# Altium PCB pcb.pcbdoc
Units mil, origin at the board's own origin, x right, y up, seen from the top; angles counter-clockwise.
Board outline 600 x 600 mil, 2 copper layers (Top Layer, Bottom Layer), stack 62.8 mil thick; 14 components, 23 nets, 74 pads, 6 vias.
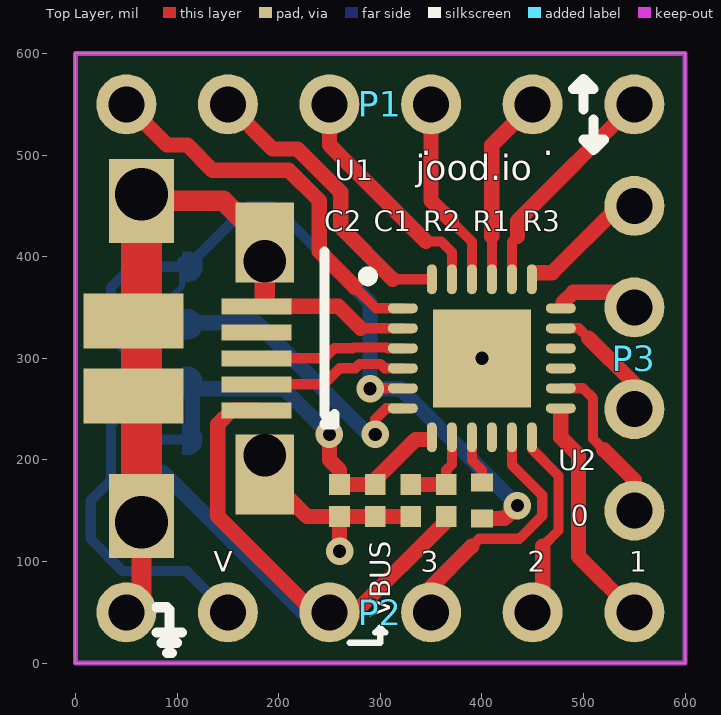
[diagram p0: Top Layer view]
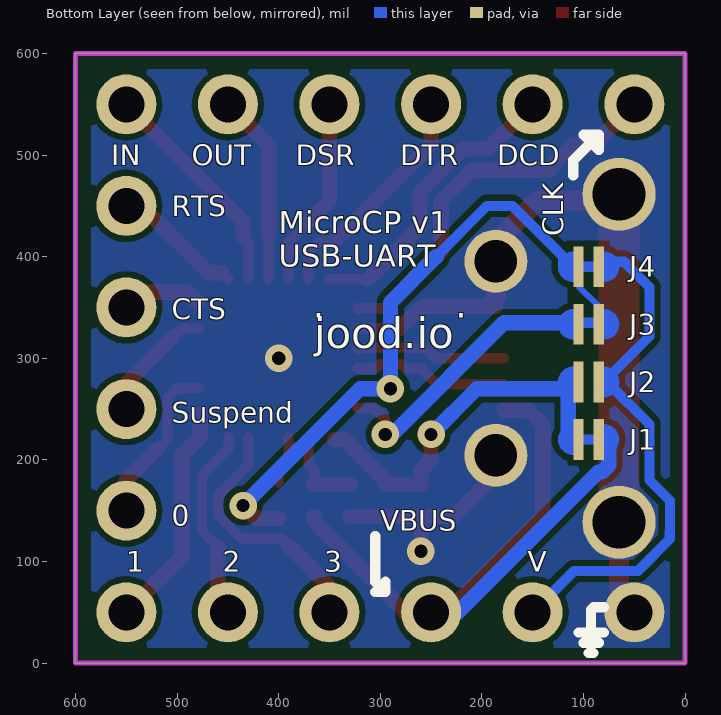
[diagram p1: Bottom Layer view, seen from below]

## Layer stack, top to bottom
Top Solder: solder mask 1, Solder Resist, Dk 3.5
Top Layer: signal copper 1.4
Core: dielectric 60, FR-4, Dk 4.6
Bottom Layer: signal copper 1.4
Bottom Solder: solder mask 1, Solder Resist, Dk 3.5

## Board outline
0,0 600,0 600,600 0,600

## Design rules (kind name [scope] priority, off if disabled: settings)
BoardOutlineClearance [All] p1: gap=15
Clearance [All] p1: gap=6
ComponentClearance [All] p1 off: gap=6 collisioncheckmode=3 verticalgap=100000 showdistances=FALSE
DiffPairsRouting [All] p1: maxlimit=10 minlimit=6 mostfreqgap=6 toplayer_minwidth=6 toplayer_maxwidth=10 toplayer_prefwidth=6 bottomlayer_minwidth=6 bottomlayer_maxwidth=10 bottomlayer_prefwidth=6 maxuncoupledlength=500
Height [All] p1 off: minheight=0 maxheight=1000 prefheight=500
HoleSize [All] p1: absolutevalues=TRUE maxlimit=100 minlimit=13 maxpercent=80.000 minpercent=20.000
MinimumAnnularRing [All] p1: minimumring=7
MinimumSolderMaskSliver [All] p1: minsoldermaskwidth=4
PlaneClearance [All] p1: clearance=15
PlaneConnect [All] p1: planeconnectstyle=Direct reliefexpansion=20 reliefentries=4 reliefconductorwidth=10 reliefairgap=10
PolygonConnect [All] p1: connectstyle=Direct reliefconductorwidth=10 reliefentries=4 polygonreliefangle="90 Angle" airgapwidth=10
RoutingVias [All] p1: holewidth=13 width=27 viastyle="Through Hole" minholewidth=13 minwidth=27 maxholewidth=13 maxwidth=27
SilkToBoardRegionClearance [All] p1 off:
SilkToSilkClearance [All] p1 off: silktosilkclearance=6
SilkToSolderMaskClearance [IsPad] p1 off: minsilkscreentomaskgap=6 clearancetoexposedcopper=TRUE
SolderMaskExpansion [All] p1: expansion=3
Width [All] p1: maxlimit=50 minlimit=6 preferedwidth=6
Width Width_50_impdedance [All] p2: maxlimit=10 minlimit=10 preferedwidth=10 impedancedriven=TRUE minimp=50.000000 maximp=50.000000 favimp=50.000000
20 further rules are at their usual default settings.

## Classes and differential pairs
differential pair D: +D_P -D_N

## Components (designator, comment, footprint, x,y, rotation, side; value= is the part's Value field where it differs from the comment)
C1 "0.10µF" 0402L 295,160 r90 top
C2 "4.7uF" 0402L 260,160 r90 top
J1 "Jumper_Open" JO 95,220 r180 bottom
J2 "Jumper_Open" JO 95,276.67 r0 bottom
J3 "Jumper_Open" JO 95,333.33 r0 bottom
J4 "Jumper_Open" JO 95,390 r0 bottom
P1 "Header 6" HDR1X6 550,550 r180 top locked
P2 "Header 6" HDR1X6 550,50 r180 top locked
P3 "Header 4" HDR1X4 550,150 r90 top locked
R1 "22.1K" 0402L 365,160 r270 top
R2 "47.5K" 0402L 330,160 r90 top
R3 "1K" RESC0402(1005)_L 400,160 r270 top
U1 "10103592-0001LF" 10103592-0001LF_NOSLOTS 178.15,300 r270 top
U2 "CP2102N-A01-GQFN24" CP2102N-QFN24 400,300 r0 top

## Footprints (in the part's own frame and the unit in brackets; to place one, negate y for a bottom-side part, rotate by r counter-clockwise, add the part's x,y. Pads: shape width x height; smd on the part's side, far side on the other; paste and mask are expansions set on the pad)
0402L [mm] "0402L"
  rect 0.52x0.52 smd: 1(-0.4,0) 2(0.4,0)
  body extent -0.55,-0.3 0.55,0.3, height 0.6
10103592-0001LF_NOSLOTS [mm] "micro B USB 2.0 Receptacle Connector 5 Position Surface Mount, Right Angle, Horizontal Rev"
  rect 2.1x1.625 smd: 0(-3.938,-2.875) 0(3.938,-2.875)
  rect 2x1.46 smd: 0(-2.9,0.205) 0(2.9,0.205)
  rect 1.375x2.5 smd: 0(-0.937,-3.075) 0(0.937,-3.075)
  rect 0.4x1.75 smd mask+0.071: 1(1.3,0) 2(0.65,0) 3(0,0) 4(-0.65,0) 5(-1.3,0)
CP2102N-QFN24 [mm] "QFN, 24-Leads, Body 4.00x4.00mm, Pitch 0.50mm, Thermal Pad 2.45x2.45mm, IPC Medium Density"
  rect 2.45x2.45 smd mask+0.071: 0(0,0)
  oval 0.75x0.25 smd mask+0.071: 1(-1.975,1.25) 2(-1.975,0.75) 3(-1.975,0.25) 4(-1.975,-0.25) 5(-1.975,-0.75) 6(-1.975,-1.25) 13(1.975,-1.25) 14(1.975,-0.75) 15(1.975,-0.25) 16(1.975,0.25) 17(1.975,0.75) 18(1.975,1.25)
  oval 0.25x0.75 smd mask+0.071: 7(-1.25,-1.975) 8(-0.75,-1.975) 9(-0.25,-1.975) 10(0.25,-1.975) 11(0.75,-1.975) 12(1.25,-1.975) 19(1.25,1.975) 20(0.75,1.975) 21(0.25,1.975) 22(-0.25,1.975) 23(-0.75,1.975) 24(-1.25,1.975)
  silkscreen extent -2.97,1.93 -2.72,2.17, body extent -2.05,-2.05 2.05,2.05, height 0.8
HDR1X4 [mm] "Connector; Header; 4 Position"
  round 1.5 hole 0.9: 1(0,0) 2(2.54,0) 3(5.08,0) 4(7.62,0)
HDR1X6 [mm] "Connector; Header; 6 Position"
  round 1.5 hole 0.9: 1(0,0) 2(2.54,0) 3(5.08,0) 4(7.62,0) 5(10.16,0) 6(12.7,0)
JO [mil] "Open Jumper"
  rect 10x40 smd: 1(10,0) 2(-10,0)
  Top Layer region: 10,-15 15,-15 20.74,-13.86 25.61,-10.61 28.86,-5.74 30,0 30,0 28.86,5.74 25.61,10.61 20.74,13.86 15,15 15,15 10,15
  Top Layer region: -10,15 -15,15 -20.74,13.86 -25.61,10.61 -28.86,5.74 -30,0 -30,0 -28.86,-5.74 -25.61,-10.61 -20.74,-13.86 -15,-15 -15,-15 -10,-15
RESC0402(1005)_L [mm] "Chip Resistor, Body 1.0x0.5mm, IPC High Density"
  rect 0.45x0.55 smd: 1(-0.45,0) 2(0.45,0)
  body extent -0.52,-0.27 0.53,0.28, height 0.4

## Part data
C1: library part CMP-1034-02061-1, "CAP CER 0.1UF 16V X7R 0402"
C2: library part CMP-1034-02136-1, "CAP 4.7uF 6.3V ±10% 0402 SMD"
J1 J2 J3 J4: "Open SMD Solder Jumper"
P1 P2: "Header, 6-Pin"
P3: "Header, 4-Pin"
R1: library part CMP-1011-00001-1, "22.1K SMD Resistor 0402"
R2: library part CMP-1011-00001-1, "47.5K SMD Resistor 0402"
R3: library part CMP-1011-00001-1, "RES SMD 1K OHM 1% 1/10W 0402"
U1: "CONN RCPT REV MICRO USB TYPE B"
U2: library part CP2102N-QFN24, "USB-UART"

## Free pads (board coordinates)
  round 0 / inner round 62 / far side round 62 hole 42: 0(186.22,204.53) 1(186.22,395.47)
  round 0 / inner round 72 / far side round 72 hole 52: 2(64.96,138.58) 3(64.96,461.42)

## Via types
v1: diameter 27, hole 13, Top Layer to Bottom Layer, 6 vias

## Nets (pads, with @x,y where several pads share a name; then routed paths per layer and width w, separated by ;. In a path a pad name is that pad's centre, name@x,y a point inside that pad or via, vN(x,y) a via of type N, cw(c..) or ccw(c..) an arc to the next point about the centre after c; other vN are vias at no path point)
CTS: P3.3 U2.18 | length 80.4
  Top Layer w15: 480,355 490,365 535,365 P3.3
D_N: U1.2 U2.4 | length 154.2
  Top Layer w10: U1.2 244.41,274.41 260.16,290.16 275.51,290.16 279.85,294.5 300.15,294.5 304.49,290.16 U2.4
D_P: U1.3 U2.3 | length 148.7
  Top Layer w10: U1.3 245,300 254.84,309.84 272.57,309.84 273.22,310.5 306.78,310.5 307.43,309.84 U2.3
DCD: P1.5 U2.24 | length 292.5
  Top Layer w10: 312.24,377.76 U2.24
  Top Layer w15: P1.5 194,506 218.7,506 261,463.7 261,429 312.24,377.76
DSR: P1.3 U2.22 | length 188.9
  Top Layer w10: 370,435 390.16,414.84 U2.22
  Top Layer w15: P1.3 350,455 370,435
DTR: P1.4 U2.23 | length 230.9
  Top Layer w10: 345,415 360,415 370.47,404.53 U2.23
  Top Layer w15: P1.4 250,510 345,415
GND: C1.1 C2.1 P2.6 pad.0 pad.1 pad.2 pad.3 R2.1 U1.0 U1.5 U2.0 U2.2 | length 942.6
  Top Layer w10: 280.47,329.53 U2.2
  Top Layer w15: U1.0@186.22,185.83 227.8,144.25 C2.1 ; U1.5@186.22,351.18 258.82,351.18 280.47,329.53 ; v1(260,110) C2.1 ; R2.1 C2.1
  Top Layer w20: P2.6 64.96,64.96 pad.2 U1.0@64.96,144.98 ; U1.0@64.96,455.02 145.37,455.02 186.22,414.17 pad.1 186.22,361.22
  Top Layer w40: U1.0@64.96,144.98 U1.0@64.96,455.02
  other v1: 400,300
GPIO0: P3.1 U2.14 | length 163.2
  Top Layer w10: U2.14 499.53,270.47 509.47,260.53 509.47,220.53 520,210
  Top Layer w15: 520,210 550,180 P3.1
GPIO1: P2.1 U2.13 | length 224.9
  Top Layer w15: 477.76,245 477.76,222.05 495,204.81 495,105 P2.1
GPIO2: P2.2 U2.12 | length 193.7
  Top Layer w10: U2.12 449.21,210.79 475.5,184.5 475.5,130.5 460,115
  Top Layer w15: P2.2 460,60 460,115
GPIO3: P2.3 U2.11 | length 253.2
  Top Layer w10: 390,115 397.43,122.43 437.07,122.43 459.5,144.85 459.5,165.15 429.53,195.12 U2.11
  Top Layer w15: P2.3 350,75 390,115
IN: P1.1 U2.20 | length 222.1
  Top Layer w10: U2.20 429.53,414.53 435,420
  Top Layer w15: 435,420 435,435 P1.1
OUT: P1.2 U2.21 | length 188.9
  Top Layer w10: U2.21 409.84,419.84
  Top Layer w15: 409.84,419.84 409.84,509.84 P1.2
RI/CLK: P1.6 U2.1 | length 384.7
  Top Layer w10: P1.6 P1.6@55,545 ; 275,370 295.79,349.21 U2.1
  Top Layer w15: P1.6@55,545 90.14,509.86 110.14,509.86 135,485 210,485 240,455 240,405 275,370
RSTB: R3.1 U2.9 | length 48.6
  Top Layer w10: U2.9 390.16,199.84 400,190 R3.1
RTS: P3.4 U2.19 | length 130.7
  Top Layer w10: U2.19 455.73,384.27
  Top Layer w15: 455.73,384.27 469.27,384.27 535,450 P3.4
SUSPEND: P3.2 U2.17 | length 119.8
  Top Layer w10: U2.17 495.47,329.53 505,320
  Top Layer w15: 505,320 550,275 P3.2
V: J2.2 J4.2 P2.5 | length 507.1
  Bottom Layer w10: 14.97,130.03 14.97,159.97 35,180 35,235 75,275 ; 15,130 15,122.08 46.55,90.53 109.47,90.53 P2.5 ; 70,395 60,395 35,370 35,321.67 J2.2@85,271.67
VBUS: J1.1 P2.4 R1.2 U1.1 | length 700.1
  Top Layer w15: U1.1 153.82,248.82 140,235 140,144.85 234.85,50 P2.4 275.31,50 365,139.69 R1.2
  Bottom Layer w15: 75,220 75,195 81.92,188.08 85.46,188.08 223.55,50 P2.4
VBUS_L: R1.1 R2.2 U2.8 | length 83.8
  Top Layer w10: R1.1 365,190 370.47,195.47 U2.8
  Top Layer w15: R2.2 R1.1
VCC: C1.2 C2.2 J1.2 J2.1 U2.7 | length 361.6
  Top Layer w15: v1(250,225) 250,200 260,190 C2.2 C1.2 295,180.31 334.69,220 345,220
  Bottom Layer w15: 115,218.51 115,265 120,270 205,270 v1(250,225)
VIO: J3.2 J4.1 R3.2 U2.5 | length 695.4
  Top Layer w10: v1(290,270) 290.47,270.47 U2.5
  Top Layer w15: R3.2 422.28,142.28 v1(435,155)
  Bottom Layer w6: J3.2 85,335 85,351.06 105,371.06 J4.1
  Bottom Layer w10: 80,390 J4.1@100,390 ; J3.2@85,335 105,335 ; J4.1 J4.1@105,395 ; 120,395 120,400 170,450 195,450 245,400
  Bottom Layer w15: 245,400 290,355 v1(290,270) 320,270 v1(435,155)
VREG_O: J3.1 U2.6 | length 267.3
  Top Layer w10: v1(295,225) 295,240 305.79,250.79 U2.6
  Bottom Layer w15: 120,335 178.18,335 288.18,225 v1(295,225)
pads on no net: U1.4 U2.10 U2.15 U2.16
copper on no net: | length 20
  Bottom Layer w10: 85,220 105,220

## Polygon pours and split planes (outlines as drawn)
GND on Bottom Layer "BL_GND" (solid, remove dead copper, pour order 0): 15,15 15,585 585,585 585,15

## Keep-outs
Keep-Out Layer:
  the board outline again, w5

## Silkscreen, mask and mechanical layers (free items; w line width, h text height)
Top Overlay:
  lines w6: 270,20 300,20 300,30 ; 300,30 300,35 ; 300,30 300,35 ; 300,35 305,30 295,30 300,35
  lines w10: 80,30 105,30 ; 80,55 90,55 92.5,52.5 92.5,30 ; 85,20 100,20 ; 90,10 95,10 ; 245,405 245,245 255,235 ; 500,545 500,575 ; 510,535 510,505 ; 255,235 245,235 255,245 255,235 ; 500,575 510,565 490,565 500,575 ; 510,505 520,515 500,515 510,505
  text "." at 340,500 h25
  text "." at 460,500 h25
  text "jood.io" at 335,475 h25
  text "0" at 505,135 h20
  text "V" at 155,90 h20
  text "3" at 340,90 h20
  text "2" at 445,90 h20
  text "1" at 545,90 h20
  text "VBUS" at 310,45 h20 r90
Bottom Overlay:
  lines w10: 80,30 105,30 ; 80,55 90,55 92.5,52.5 92.5,30 ; 85,20 100,20 ; 90,10 95,10 ; 110,480 110,495 85,520 ; 305,70 295,70 ; 305,125 305,80 295,70 ; 85,520 85,505 90,510 100,520 85,520 ; 295,70 295,80 295,70
  text "DCD" at 185,490 h20
  text "DTR" at 280.33,490 h20
  text "DSR" at 383,490 h20
  text "OUT" at 485.66,490 h20
  text "IN" at 565,490 h20
  text "RTS" at 505,440 h20
  text "CLK" at 120,420 h20 r270
  text "MicroCP v1 / USB-UART" at 400,390 h22
  text "." at 215,340 h25
  text "." at 355,340 h25
  text "CTS" at 505,338.33 h20
  text "jood.io" at 365,310 h30
  text "Suspend" at 505,236.67 h20
  text "0" at 505,135 h20
  text "VBUS" at 300,130 h20
  text "V" at 155,90 h20
  text "3" at 355,90 h20
  text "2" at 455,90 h20
  text "1" at 550,90 h20
Bottom Solder:
  lines w10: 95,205 95,235 ; 95,260 95,290 ; 95,315 95,350 ; 95,375 95,405